# Altium PCB swivel_rev2.PcbDoc
Units mm, origin at the board's own origin, x right, y up, seen from the top; angles counter-clockwise.
Board outline 50 x 99.9 mm, 2 copper layers (Top Layer, Bottom Layer); 44 components, 36 nets, 175 pads, 33 vias.
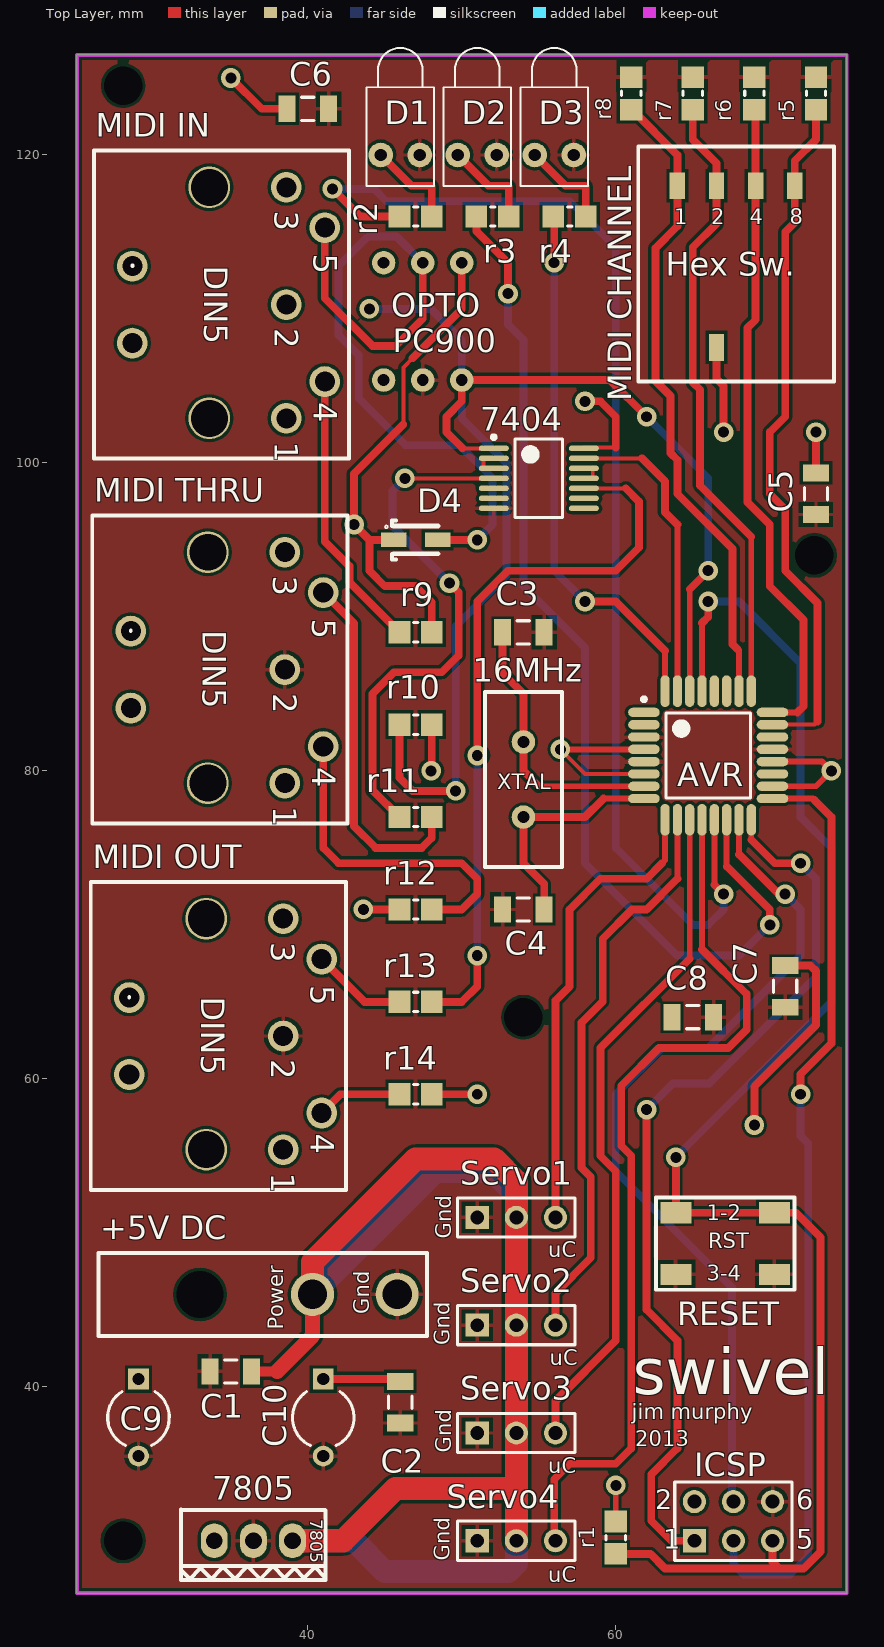
[diagram p0: Top Layer view]
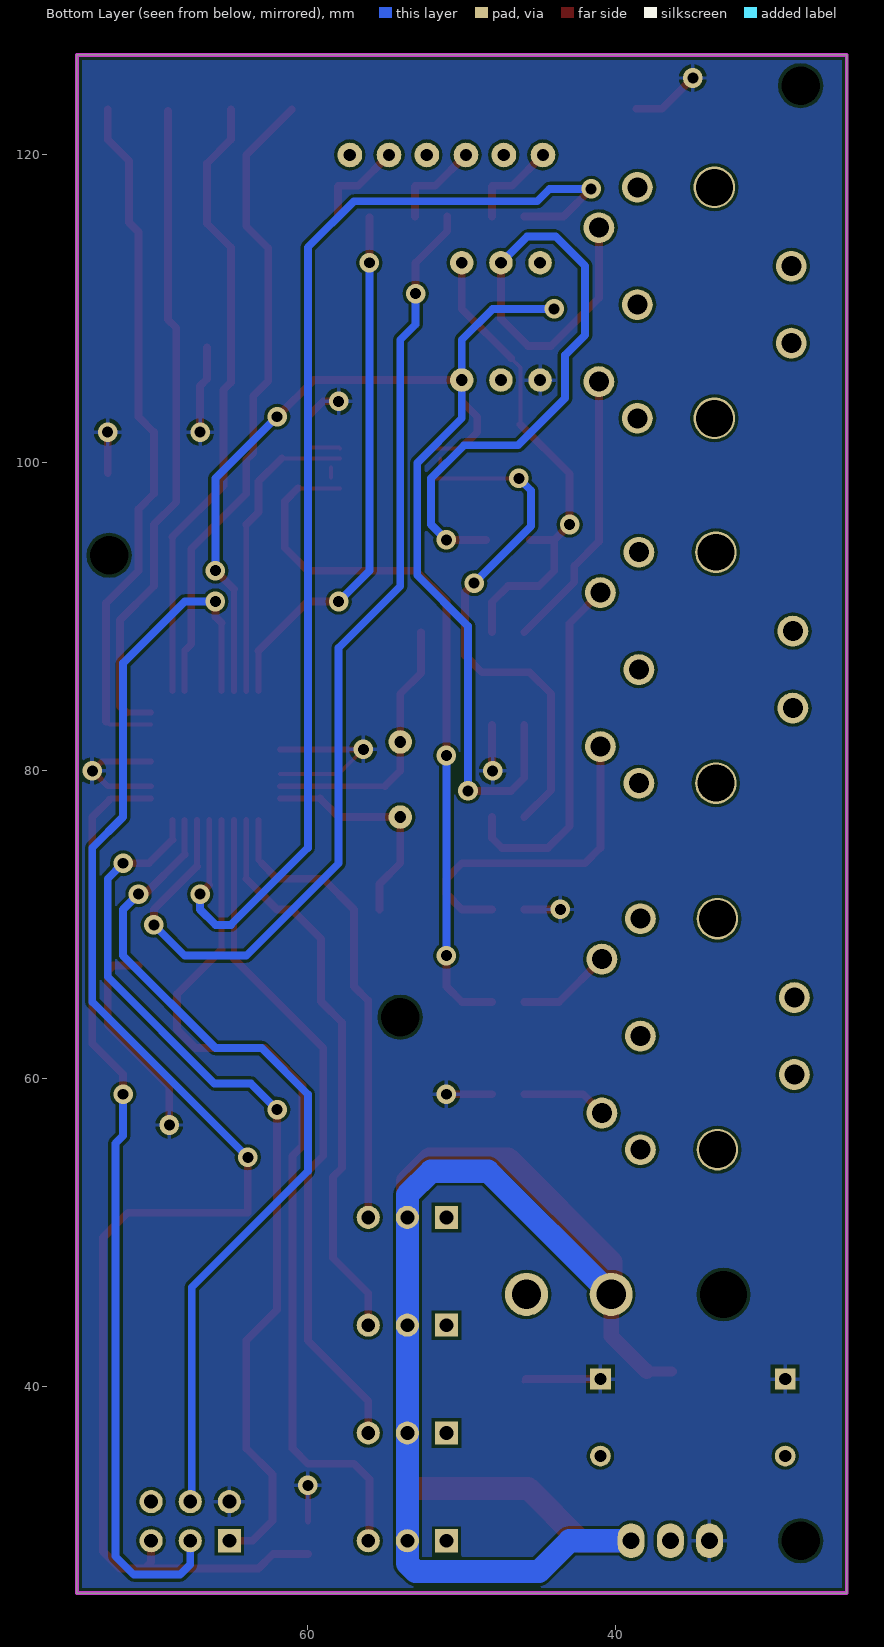
[diagram p1: Bottom Layer view, seen from below]

## Layer stack, top to bottom
Top Layer: signal copper 0.0356
Dielectric: dielectric 0.32, FR-4, Dk 4.8
Bottom Layer: signal copper 0.0356

## Board outline
25,126.5 75,126.5 75,26.6 25,26.6

## Design rules (kind name [scope] priority, off if disabled: settings)
Clearance Clearance_1 [All] p1: gap=0.2
Clearance "Polygon Clearance" [InPolygon] p2: gap=0.25
PolygonConnect [All] p1: connectstyle=Relief reliefconductorwidth=0.254 reliefentries=4 polygonreliefangle="90 Angle" airgapwidth=0.254
RoutingVias [All] p1: holewidth=0.711 width=1.27 viastyle="Through Hole" minholewidth=0.711 minwidth=1.27 maxholewidth=0.711 maxwidth=1.27
SilkscreenOverComponentPads [All] p1: minsilkscreentomaskgap=0.254
SolderMaskExpansion [All] p1: expansion=0.102
Width [All] p1: maxlimit=2 minlimit=0.254 preferedwidth=0.254
27 further rules are at their usual default settings.

## Components (designator, comment, footprint, x,y, rotation, side; value= is the part's Value field where it differs from the comment)
16MHz "XTAL" XTAL 54,77 r90 top
7404 "7404" "7404 TSSOP" 55,99 r0 top (schematic designator "Hex Inverter")
7805 "7805" 7805 39,30 r180 top (schematic designator VREG)
"+5V DC" "Big Molex" "2-Pin Big Molex" 33,46 r270 top (schematic designator P_IN)
AVR "32 TQFP" ATMEGA328 66,81 r0 top
C1 "Cap Semi" C1206 35,41 r0 top
C2 "Cap Semi" C1206 46,39 r90 top
C3 "Cap Semi" C1206 54,89 r0 top
C4 "Cap Semi" C1206 54,71 r180 top
C5 "Cap Semi" C1206 73,98 r90 top
C6 "Cap Semi" C1206 40,123 r180 top
C7 "Cap Semi" C1206 71,66 r90 top
C8 "Cap Semi" C1206 65,64 r180 top
C9 "Cap2" CAPR5-4X5 29,38 r270 top
C10 "Cap2" CAPR5-4X5 41,38 r270 top
D1 "LED1" LED-1 46,120 r90 top
D2 "LED1" LED-1 51,120 r90 top
D3 "LED1" LED-1 56,120 r90 top
D4 "1N4148" 1N4148W-FDITR-ND 47,95 r0 top
ICSP "Header 3X2" HDR2X3 65.1,30 r0 top (schematic designator ISP)
"MIDI CHANNEL" "Dip_hex" DIP_Hex 64,118 r0 top (schematic designator DIP)
"MIDI IN" "DIN5" DIN5 38.6,117.9 r270 top
"MIDI OUT" "DIN5" DIN5 38.4,70.4 r270 top
"MIDI THRU" "DIN5" DIN5 38.5,94.2 r270 top
OPTO "PC900" PC900 50,113 r180 top
r1 "10k" "Resistor 0805" 60,30.2 r90 top
r2 "220" "Resistor 0805" 47,116 r0 top
r3 "220" "Resistor 0805" 52,116 r0 top
r4 "220" "Resistor 0805" 57,116 r0 top
r5 "10k" "Resistor 0805" 73,124 r90 top
r6 "10k" "Resistor 0805" 69,124 r90 top
r7 "10k" "Resistor 0805" 65,124 r90 top
r8 "10k" "Resistor 0805" 61,124 r90 top
r9 "220" "Resistor 0805" 47,89 r0 top
r10 "270" "Resistor 0805" 47,83 r0 top
r11 "220" "Resistor 0805" 47,77 r0 top
r12 "220" "Resistor 0805" 47,71 r0 top
r13 "220" "Resistor 0805" 47,65 r0 top
r14 "220" "Resistor 0805" 47,59 r0 top
RESET "RESET" Reset 65,48 r0 top (schematic designator RST)
Servo1 "Header 3" HDR1X3 51,51 r0 top (schematic designator P1)
Servo2 "Header 3" HDR1X3 51,44 r0 top (schematic designator P2)
Servo3 "Header 3" HDR1X3 51,37 r0 top (schematic designator P3)
Servo4 "Header 3" HDR1X3 51,30 r0 top (schematic designator P4)

## Footprints (in the part's own frame and the unit in brackets; to place one, negate y for a bottom-side part, rotate by r counter-clockwise, add the part's x,y. Pads: shape width x height; smd on the part's side, far side on the other; paste and mask are expansions set on the pad)
1N4148W-FDITR-ND [mm] "Digikey part 1N4148W-FDITR-ND diode"
  rect 1.65x0.95 smd: 1(-1.425,0) 2(1.425,0)
  silkscreen extent -1.99,-1.27 1.45,1.27, body extent -1.43,-0.85 1.42,0.85, height 1.35
"2-Pin Big Molex" [mm] "Molex 70555-0037"
  round 2.8 hole 1.905: 1(0,7.3) 2(0,12.802)
  round 0 hole 3.048 unplated: ""(0,0)
  silkscreen extent -2.7,-6.6 2.7,14.73
"7404 TSSOP" [mm] "TSOP, 14-Leads, Body 5.1x4.5mm (max), Pitch 0.65mm, IPC Medium Density"
  oval 1.95x0.35 smd: 1(-2.925,1.95) 2(-2.925,1.3) 3(-2.925,0.65) 4(-2.925,0) 5(-2.925,-0.65) 6(-2.925,-1.3) 7(-2.925,-1.95) 8(2.925,-1.95) 9(2.925,-1.3) 10(2.925,-0.65) 11(2.925,0) 12(2.925,0.65) 13(2.925,1.3) 14(2.925,1.95)
  silkscreen extent -3.05,-2.55 1.55,2.8, body extent -2.25,-2.55 2.25,2.55, height 1.1
7805 [mm] "to220 package"
  oval 1.75x2.25 hole 1.1: COM(2.54,0) IN(0,0) OUT(5.08,0)
  silkscreen extent -2.16,-2.03 7.24,2.54
ATMEGA328 [mm] "TQFP, 32-Leads, Body 9.3x9.3mm (max), Pitch 0.80mm, IPC Low Density"
  oval 2.05x0.6 smd: 1(-4.175,2.8) 2(-4.175,2) 3(-4.175,1.2) 4(-4.175,0.4) 5(-4.175,-0.4) 6(-4.175,-1.2) 7(-4.175,-2) 8(-4.175,-2.8) 17(4.175,-2.8) 18(4.175,-2) 19(4.175,-1.2) 20(4.175,-0.4) 21(4.175,0.4) 22(4.175,1.2) 23(4.175,2) 24(4.175,2.8)
  oval 0.6x2.05 smd: 9(-2.8,-4.175) 10(-2,-4.175) 11(-1.2,-4.175) 12(-0.4,-4.175) 13(0.4,-4.175) 14(1.2,-4.175) 15(2,-4.175) 16(2.8,-4.175) 25(2.8,4.175) 26(2,4.175) 27(1.2,4.175) 28(0.4,4.175) 29(-0.4,4.175) 30(-1.2,4.175) 31(-2,4.175) 32(-2.8,4.175)
  silkscreen extent -4.3,-2.75 2.75,3.77, body extent -3.5,-3.5 3.5,3.5, height 1.2
C1206 [mm] "Chip Capacitor, Body 3.2x1.6mm, IPC High Density"
  rect 1.1x1.7 smd: 1(-1.35,0) 2(1.35,0)
  silkscreen extent -0.4,-0.75 0.4,0.75, body extent -1.7,-0.9 1.7,0.9, height 1.3
CAPR5-4X5 [mm] "Capacitor; 2 Leads"
  rect 1.35x1.35 hole 0.8: 1(-2.5,0)
  round 1.35 hole 0.8: 2(2.5,0)
  silkscreen extent -1.69,-2 1.82,2
DIN5 [mm] "SDS-51J Digi: CP-2350-ND"
  round 2 hole 1.3: 1(15,0) 2(7.62,0) 3(0,0) 4(12.62,2.5) 5(2.62,2.5) 6(5.12,-10) 7(10.12,-10)
  round 2.7 hole 2.4: 8(0,-5) 9(15,-5)
  silkscreen extent -2.38,-12.5 17.62,4.06
DIP_Hex [mm] "Digi part 360 2212 2 ND"
  rect 1x1.75 smd: 1(0,0) 1(0,0) 2(2.54,0) 4(5.08,0) 8(7.62,0) C(2.54,-10.5)
  silkscreen extent -2.54,-12.7 10.16,2.54
HDR1X3 [mm] "Connector; Header; 3 Position"
  rect 1.5x1.5 hole 0.9: 1(0,0)
  round 1.5 hole 0.9: 2(2.54,0) 3(5.08,0)
  silkscreen extent -1.27,-1.27 6.35,1.27
HDR2X3 [mm] "Connector; Header; 3x2 Position"
  rect 1.5x1.5 hole 0.9: 1(0,0)
  round 1.5 hole 0.9: 2(0,2.54) 3(2.54,0) 4(2.54,2.54) 5(5.08,0) 6(5.08,2.54)
  silkscreen extent -1.27,-1.27 6.35,3.81
LED-1 [mm] "LED; 2 Leads"
  round 1.6 hole 0.8: 1(0,1.27) 2(0,-1.27)
  silkscreen extent -2,-2.2 6.95,2.2
PC900 [mil] "DIP6 Optoisolator"
  round 60 hole 30: 1(0,0) 2(100,0) 3(200,0) 4(0,300) 5(100,300) 6(200,300)
Reset [mm] "SMD Switch"
  rect 2x1.375 smd: 1(-1.1,3.3) 2(5.3,3.3) 3(-1.1,-0.7) 4(5.3,-0.7)
  silkscreen extent -2.4,-1.7 6.6,4.3
"Resistor 0805" [mm] "Chip Resistor, 2-Leads, Body 2.0x1.3mm, IPC Low Density"
  rect 1.4x1.45 smd: 1(-1.05,0) 2(1.05,0)
  silkscreen extent -0.15,-0.63 0.15,0.63, body extent -1.1,-0.67 1.1,0.67, height 0.7
XTAL [mil] "HC49"
  round 60 hole 30: 1(0,0) 2(192.13,0)
  silkscreen extent -127,-98 320,98

## Part data
"+5V DC": library part "2-Pin Big Molex", "Molex 39-30-1020"
C1 C2 C3 C4 C5 C6 C7 C8: "Capacitor (Semiconductor SIM Model)"
C9 C10: "Capacitor"
D1 D2 D3: "Typical RED GaAs LED"
ICSP: "Header, 3-Pin, Dual row"
r1 r2 r3 r4 r5 r6 r7 r8 r9 r10 r11 r12 r13 r14: library part res0805
Servo1 Servo2 Servo3 Servo4: "Header, 3-Pin"

## Free pads (board coordinates)
  round 1.524 hole 2.5: 1(28,30) 1(28,124.5) 1(54,64) 1(72.9,94)

## Via types
v1: diameter 1.27, hole 0.711, Top Layer to Bottom Layer, 33 vias

## Nets (pads, with @x,y where several pads share a name; then routed paths per layer and width w, separated by ;. In a path a pad name is that pad's centre, name@x,y a point inside that pad or via, vN(x,y) a via of type N, cw(c..) or ccw(c..) an arc to the next point about the centre after c; other vN are vias at no path point)
CAT: "MIDI IN.5" D4.2 OPTO.2 | length 50.5
  Top Layer w0.508: 41.1,115.28 41.1,110.7 44.2,107.6 45.7,107.6 47.46,109.36 OPTO.2 ; D4.2 v1(51,95)
  Bottom Layer w0.508: OPTO.2 45.76,114.7 43.9,114.7 42,112.8 42,108.3 43.3,107 43.3,104.2 46.35,101.15 49.85,101.15 52,99 52,96 v1(51,95)
GND: 7404.7 7805.COM "+5V DC.2" "MIDI OUT.2" "MIDI THRU.2" AVR.3 AVR.5 AVR.21 C1.1 C2.1 C3.2 C4.2 C5.1 C6.1 C7.1 C8.1 C9.2 C10.2 D1.2 D2.2 D3.2 ICSP.6 OPTO.5 r5.2 r6.2 r7.2 r8.2 RESET.3 RESET.4 Servo1.1 Servo2.1 Servo3.1 Servo4.1
MISO: AVR.16 ICSP.1 | length 59.1
  Top Layer w0.381: 68.8,75.525 AVR.16
  Top Layer w0.508: v1(62,58) 62,45 64,43 64,36 62.3,34.3 62.3,31.3 63.6,30 ICSP.1 ; 68.8,75.525 70.325,74 v1(72,74)
  Bottom Layer w0.508: v1(62,58) 63.7,59.7 66.075,59.7 73,66.625 73,73 v1(72,74)
MOSI: AVR.15 ICSP.4 | length 56.1
  Top Layer w0.381: 68,74.575 AVR.15
  Top Layer w0.508: 68,74.575 70.575,72 v1(71,72)
  Bottom Layer w0.508: ICSP.4 67.54,32.64 67.54,46.46 60,54 60,59 63,62 66,62 72,68 72,71 v1(71,72)
NetAVR_13: AVR.13 r2.1 | length 79.6
  Top Layer w0.381: 66.4,72.6 AVR.13
  Top Layer w0.508: v1(41.6,117.8) 43.4,116 r2.1 ; 66.4,72.6 v1(67,72)
  Bottom Layer w0.508: v1(41.6,117.8) 44.3,117.8 45.1,117 57,117 60,114 60,75 65,70 66,70 67,71 v1(67,72)
NetAVR_14: AVR.14 r3.1 | length 68.2
  Top Layer w0.381: 67.2,73.8 AVR.14
  Top Layer w0.508: r3.1 50.95,115.05 53,113 v1(53,111) ; 67.2,73.8 70,71 v1(70,70)
  Bottom Layer w0.508: v1(53,111) 53,109 54,108 54,92 58,88 58,74 64,68 68,68 v1(70,70)
NetAVR_32: AVR.32 r4.1 | length 35
  Top Layer w0.254: r4.1 r4.1@56,115.95
  Top Layer w0.381: AVR.32 63.2,87.8
  Top Layer w0.508: v1(56,113) r4.1@56,115.95 ; v1(58,91) 60,91 63.2,87.8
  Bottom Layer w0.508: v1(56,113) 56,93 v1(58,91)
NetD1_1: D1.1 r2.2 | length 6.1
  Top Layer w0.254: 48,118 48.05,117.95
  Top Layer w0.508: D1.1 46.73,118 48,118 ; r2.2 48.05,117.95
NetD2_1: D2.1 r3.2 | length 6.1
  Top Layer w0.254: 53,118 53.05,117.95
  Top Layer w0.508: D2.1 51.73,118 53,118 ; r3.2 53.05,117.95
NetD3_1: D3.1 r4.2 | length 6.1
  Top Layer w0.254: 58,118 58.05,117.95
  Top Layer w0.508: D3.1 56.73,118 58,118 ; r4.2 58.05,117.95
NetD4_1: D4.1 OPTO.1 r9.2 | length 31.7
  Top Layer w0.254: 46.2,102.5 46.2,106.2 46.8,106.8
  Top Layer w0.508: D4.1 44,95 ; 46.2,102.5 43,99.3 v1(43,96) 44,95 ; 46.8,106.8 50,110 OPTO.1 ; r9.2 48.05,90.95 47,92 45,92 44,93 44,95
"NetHex Inverter_2": 7404.2 7404.3 | length 0.6
  Top Layer w0.254: 7404.3@51.4,99.65 7404.2@51.4,100.3
"NetHex Inverter_4": 7404.4 r11.1 | length 34.7
  Top Layer w0.254: v1(46.3,99) 7404.4
  Top Layer w0.508: r11.1 44.2,78.75 44.2,85 45.6,86.4 48.7,86.4 49.8,87.5 49.8,91.6 v1(49.2,92.2)
  Bottom Layer w0.508: v1(46.3,99) 45.5,98.2 45.5,95.9 v1(49.2,92.2)
"NetHex Inverter_10": 7404.10 r13.2 | length 47.2
  Top Layer w0.254: 7404.10 60.65,98.35
  Top Layer w0.508: r13.2 50,65 51,66 v1(51,68) ; v1(51,81) 51,91 53,93 60,93 61.5,94.5 61.5,97.5 60.65,98.35
  Bottom Layer w0.508: v1(51,68) v1(51,81)
"NetHex Inverter_11": 7404.11 7404.12 | length 0.7
  Top Layer w0.254: 7404.11@58.5,99.05 7404.12@58.5,99.7
"NetMIDI IN_4": "MIDI IN.4" r9.1 | length 18.3
  Top Layer w0.508: 41.1,105.28 41.1,94.9 42.7,93.3 42.7,92.25 r9.1
"NetMIDI OUT_4": "MIDI OUT.4" r14.1 | length 5.6
  Top Layer w0.508: 40.9,57.78 42.12,59 r14.1
"NetMIDI OUT_5": "MIDI OUT.5" r13.1 | length 6.2
  Top Layer w0.508: 40.9,67.78 43.68,65 r13.1
"NetMIDI THRU_4": "MIDI THRU.4" r12.2 | length 21.8
  Top Layer w0.508: 41,81.58 41,75 42,74 50,74 51,73 51,72 50,71 r12.2
"NetMIDI THRU_5": "MIDI THRU.5" r11.2 | length 23.3
  Top Layer w0.508: 41,91.58 43,89.58 43,76.4 44.4,75 47.4,75 48.05,75.65 r11.2
RST: AVR.29 ICSP.5 r1.1 RESET.1 RESET.2 | length 100.9
  Top Layer w0.381: AVR.29 65.6,89.6
  Top Layer w0.508: r1.1 62.25,29.15 63.2,28.2 70.6,28.2 ; v1(63.9,54.9) RESET.1 RESET.2 71.7,51.3 73.3,49.7 73.3,29.3 72.2,28.2 70.6,28.2 ; 65.6,89.6 66,90 v1(66,91) ; ICSP.5 70.18,28.62 70.6,28.2
  Bottom Layer w0.508: v1(63.9,54.9) 74,65 74,75 72,77 72,87 68,91 v1(66,91)
RX: 7404.1 AVR.30 OPTO.4 r10.1 | length 86.4
  Top Layer w0.254: 50.05,100.95 7404.1
  Top Layer w0.381: AVR.30 64.8,91.8
  Top Layer w0.508: r10.1 45.95,79.55 46.8,78.7 v1(49.6,78.7) ; 50.05,100.95 49,102 49,103 50,104 OPTO.4 59.62,105.38 v1(62,103) ; 64.8,91.8 v1(66,93)
  Bottom Layer w0.508: v1(44,110) 48,110 50,108 OPTO.4 50,102.9 52.9,100 52.9,92.7 49.6,89.4 v1(49.6,78.7) ; v1(62,103) 66,99 v1(66,93)
S1: AVR.9 Servo1.3 | length 30.5
  Top Layer w0.381: 63,74 63.2,74.2 AVR.9
  Top Layer w0.508: Servo1.3 56.08,65.08 57,66 57,71 59,73 62,73 63,74
S2: AVR.10 Servo2.3 | length 37.2
  Top Layer w0.381: 64,73 AVR.10
  Top Layer w0.508: Servo2.3 56.08,46.08 58.375,48.375 58.375,53.625 57.775,54.225 57.775,63.65 59.15,65.025 59.15,69.1 61.05,71 62,71 64,73
S3: AVR.11 Servo3.3 | length 44.3
  Top Layer w0.381: 64.8,67.8 AVR.11
  Top Layer w0.508: Servo3.3 56.08,39.08 60,43 60,54 59,55 59,62 64.8,67.8
S4: AVR.12 Servo4.3 | length 58.2
  Top Layer w0.254: Servo4.3@56,30.08 Servo4.3
  Top Layer w0.381: 65.6,68.4 AVR.12
  Top Layer w0.508: Servo4.3@56,30.08 56,34 57,35 60,35 61,36 61,55 60.35,55.65 60.35,59.55 62.8,62 67.3,62 68.5,63.2 68.5,65.5 65.6,68.4
SCK: AVR.17 ICSP.3 | length 60.5
  Top Layer w0.381: AVR.17 72.8,78.2 72.9,78.1
  Top Layer w0.508: v1(72,59) 72,60.3 74,62.3 74,77 72.9,78.1
  Bottom Layer w0.508: ICSP.3 67.64,28.46 68.3,27.8 71.3,27.8 72.5,29 72.5,55.8 72,56.3 v1(72,59)
SPOW: 7805.IN "+5V DC.1" C1.2 Servo1.2 Servo2.2 Servo3.2 Servo4.2 | length 122.3
  Top Layer w0.635: C1.2 38,41
  Top Layer w1: 38,41 40.3,43.3 40.3,46
  Top Layer w1.5: 7805.IN 42.3,30 45.7,33.4 53.54,33.4 ; 40.3,46 40.3,48.1 47,54.8 52.1,54.8 53.54,53.36 Servo1.2 Servo2.2 Servo3.2 53.54,33.4 ; Servo4.2 53.54,33.4
  Bottom Layer w1.5: 7805.IN 43,30 45,28 53,28 53.54,28.54 Servo4.2 Servo3.2 Servo2.2 Servo1.2 53.54,52.46 52,54 48.3,54 40.3,46
SW1: "MIDI CHANNEL.8" AVR.23 r5.1 | length 45.3
  Top Layer w0.254: AVR.23 72.9,83 73.1,83.2
  Top Layer w0.508: r5.1 73,121 71.62,119.62 71.62,118 71.62,115.62 71,115 71,103 70,102 70,98 71,97 71,93 73.1,90.9 73.1,83.2
SW2: "MIDI CHANNEL.4" AVR.24 r6.1 | length 42.7
  Top Layer w0.254: r6.1 r6.1@69.08,122.87
  Top Layer w0.381: AVR.24 71.8,83.8
  Top Layer w0.508: r6.1@69.08,122.87 69.08,118 69.08,109.305 68.55,108.775 68.55,97.45 70,96 70,92 72.2,89.8 72.2,84.2 71.8,83.8
SW3: "MIDI CHANNEL.2" AVR.25 r7.1 | length 40.6
  Top Layer w0.381: AVR.25 68.8,95.2
  Top Layer w0.508: r7.1 65,121 66.54,119.46 66.54,118 66.54,115.54 65,114 65,105.225 65.475,104.75 65.475,98.525 68.8,95.2
SW4: "MIDI CHANNEL.1" AVR.26 r8.1 | length 41.8
  Top Layer w0.254: r8.1 r8.1@61.05,122.95
  Top Layer w0.381: AVR.26 68,87.85
  Top Layer w0.508: r8.1@61.05,122.95 64,120 64,118 64,115.375 62.575,113.95 62.575,105.325 63.55,104.35 63.55,100.65 64,100.2 64,98 67.575,94.425 67.575,88.225 67.9,87.9
TX: 7404.13 AVR.31 | length 19.9
  Top Layer w0.254: 7404.13 61.7,100.3
  Top Layer w0.381: AVR.31 64,96
  Top Layer w0.508: 61.7,100.3 63.2,98.8 63.2,96.8 64,96
VCC: 7404.14 7805.OUT "MIDI CHANNEL.C" AVR.4 AVR.6 AVR.18 AVR.20 C2.2 C5.2 C6.2 C7.2 C8.2 C9.1 C10.1 ICSP.2 OPTO.6 r1.2 r10.2 r12.1 r14.2 | length 68.6
  Top Layer w0.254: C2.2@45.85,40.5 C2.2 ; v1(56.4,81.4) 58,79.8 AVR.6 ; 7404.14 57.975,101 60,101
  Top Layer w0.381: v1(56.4,81.4) AVR.4 ; r1.2 v1(60,33.6) ; AVR.18 73,79 v1(74,80) 73.4,80.6 AVR.20
  Top Layer w0.508: v1(35,125) 37,123 C6.2 ; C10.1 C2.2@45.85,40.5 ; v1(43.6,71) r12.1 ; r14.2 v1(51,59) ; v1@48.05,80.05 r10.2 ; v1(58,104) 59,104 60,103 60,101 ; 66.54,107.5 66.54,105.46 67,105 v1(67,102) ; v1(69,57) 69,59.5 73,63.5 73,67 72.65,67.35 C7.2 ; C5.2 v1(73,102)
  other v1: 48,80
XTAL1: 16MHz.2 AVR.7 C3.1 | length 17.8
  Top Layer w0.381: 55,79 AVR.7
  Top Layer w0.508: C3.1 52.65,86.35 54,85 16MHz.2 54,80 55,79
XTAL2: 16MHz.1 AVR.8 C4.1 | length 14.9
  Top Layer w0.381: 59.2,78.2 AVR.8
  Top Layer w0.508: C4.1 55.35,72.65 54,74 16MHz.1 58,77 59.2,78.2
pads on no net: 7404.5 7404.6 7404.8 7404.9 "+5V DC." "MIDI IN.1" "MIDI IN.2" "MIDI IN.3" "MIDI IN.6" "MIDI IN.7" "MIDI IN.8" "MIDI IN.9" "MIDI OUT.1" "MIDI OUT.3" "MIDI OUT.6" "MIDI OUT.7" "MIDI OUT.8" "MIDI OUT.9" "MIDI THRU.1" "MIDI THRU.3" "MIDI THRU.6" "MIDI THRU.7" "MIDI THRU.8" "MIDI THRU.9" AVR.1 AVR.2 AVR.19 AVR.22 AVR.27 AVR.28 OPTO.3

## Polygon pours and split planes (outlines as drawn)
VCC on Bottom Layer "Top Layer-No Net" (solid, remove dead copper, pour order 17): 75,25 25,25 25,127 75,127
GND on Top Layer "Top Layer-No Net" (solid, remove dead copper, pour order 15): 25,127 75,127 75,25 25,25

## Keep-outs
Keep-Out Layer:
  the board outline again, w0.254

## Silkscreen, mask and mechanical layers (free items; w line width, h text height)
Top Overlay:
  text "1" at 63.8,115.5 h1
  text "2" at 66.2,115.5 h1
  text "4" at 68.7,115.5 h1
  text "8" at 71.3,115.5 h1
  text "PC900" at 45.5,107.2 h1.52
  text "Gnd" at 49.3,49.6 h1 r90
  text "uC" at 55.6,48.4 h1
  text "Gnd" at 44,44.7 h1 r90
  text "Power" at 38.4,43.7 h1 r90
  text "Gnd" at 49.2,42.7 h1 r90
  text "uC" at 55.7,41.4 h1
  text "swivel" at 61.1,39.5 h3
  text "jim murphy" at 61.025,37.9 h1
  text "2013" at 61.25,36.15 h1
  text "Gnd" at 49.3,35.7 h1 r90
  text "uC" at 55.6,34.4 h1
  text "Gnd" at 49.2,28.7 h1 r90
  text "uC" at 55.6,27.3 h1

## Text inside footprints (layer, text, board x,y; h text height)
ICSP: Top Overlay "6" at 71.704,32.032 h1.27; Top Overlay "5" at 71.704,29.492 h1.27; Top Overlay "2" at 62.56,32.032 h1.27; Top Overlay "1" at 63.068,29.492 h1.27
"MIDI CHANNEL": Top Overlay "Hex Sw." at 63.238,112.158 h1.52
"MIDI IN": Top Overlay "1" at 37.838,101.39 h1.52 r270; Top Overlay "3" at 37.838,116.376 h1.52 r270; Top Overlay "2" at 37.838,108.756 h1.52 r270; Top Overlay "4" at 40.378,103.93 h1.52 r270; Top Overlay "5" at 40.378,113.582 h1.52 r270
"MIDI OUT": Top Overlay "1" at 37.638,53.89 h1.52 r270; Top Overlay "3" at 37.638,68.876 h1.52 r270; Top Overlay "2" at 37.638,61.256 h1.52 r270; Top Overlay "4" at 40.178,56.43 h1.52 r270; Top Overlay "5" at 40.178,66.082 h1.52 r270
"MIDI THRU": Top Overlay "1" at 37.738,77.69 h1.52 r270; Top Overlay "3" at 37.738,92.676 h1.52 r270; Top Overlay "2" at 37.738,85.056 h1.52 r270; Top Overlay "4" at 40.278,80.23 h1.52 r270; Top Overlay "5" at 40.278,89.882 h1.52 r270
RESET: Top Overlay "3-4" at 65.9,46.9 h1; Top Overlay "1-2" at 65.9,50.8 h1; Top Overlay "RST" at 66,49 h1